# Altium PCB MCU_Control_Board.PcbDoc (part 1 of 2)
Units mil, origin at the board's own origin, x right, y up, seen from the top; angles counter-clockwise.
Board outline 5526.15 x 3406.41 mil, 2 copper layers (Top Layer, Bottom Layer); 103 components, 170 nets, 494 pads, 166 vias.
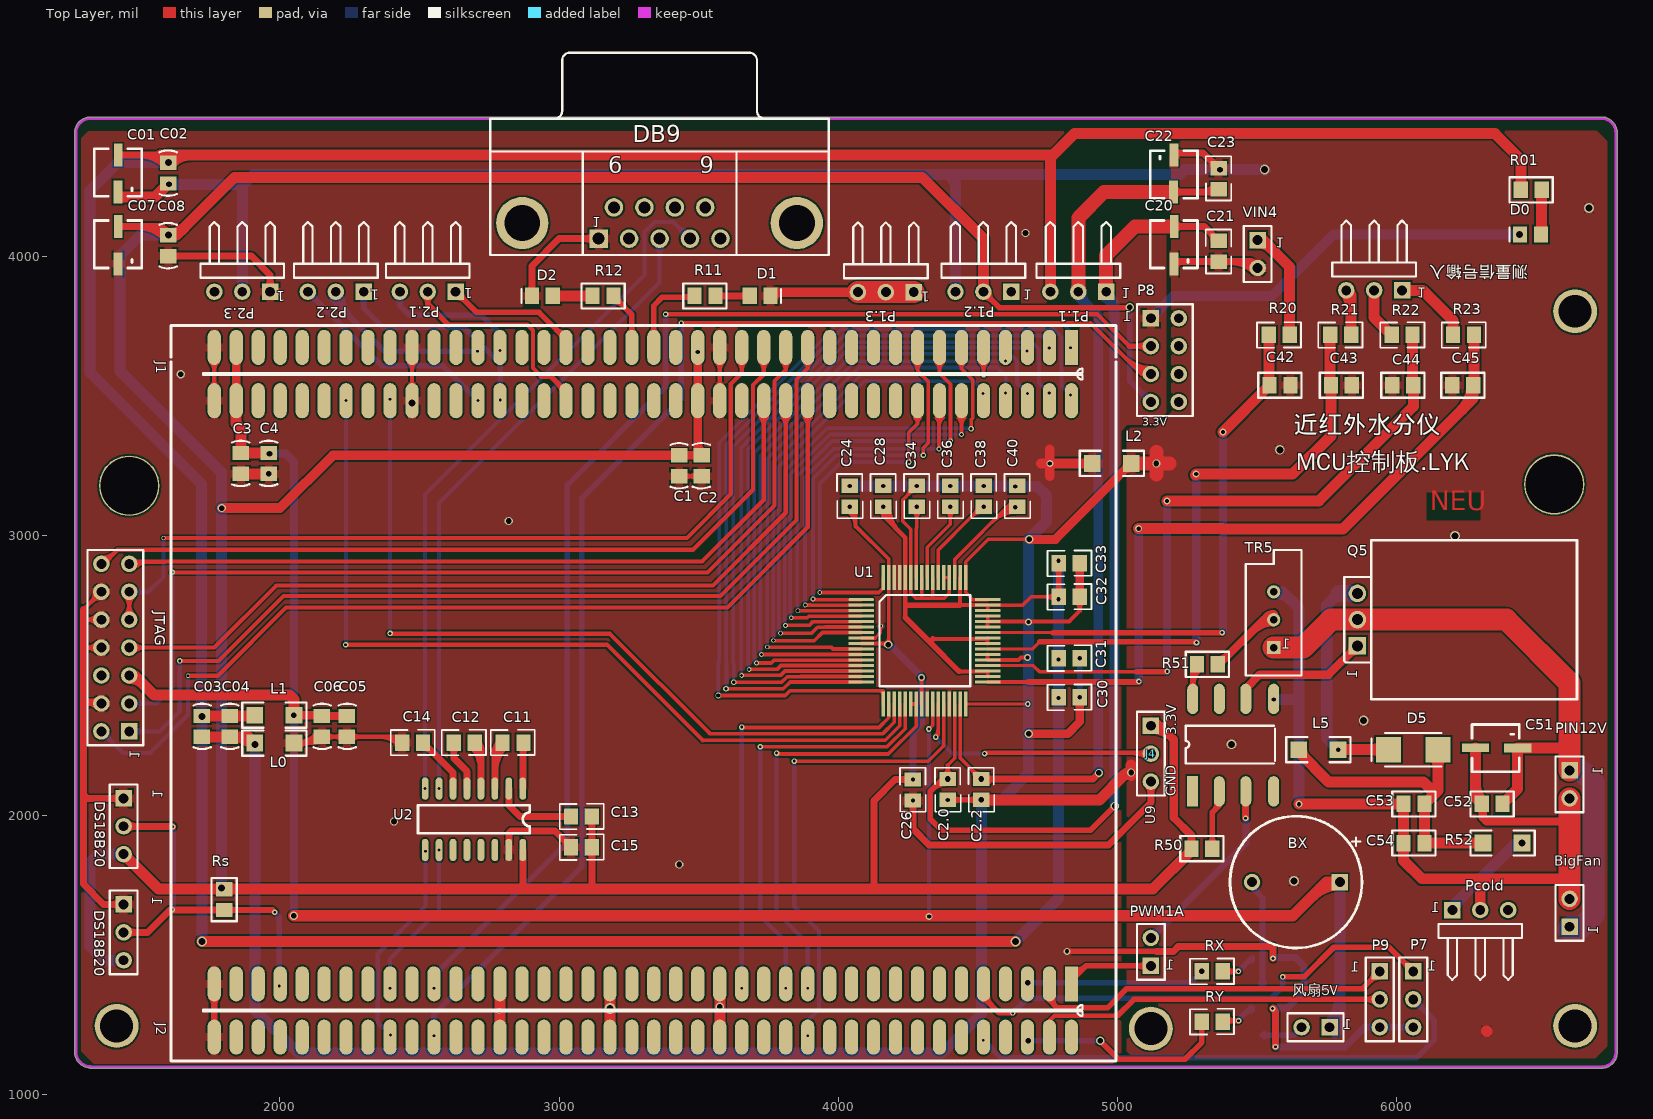
[diagram p0: Top Layer view]
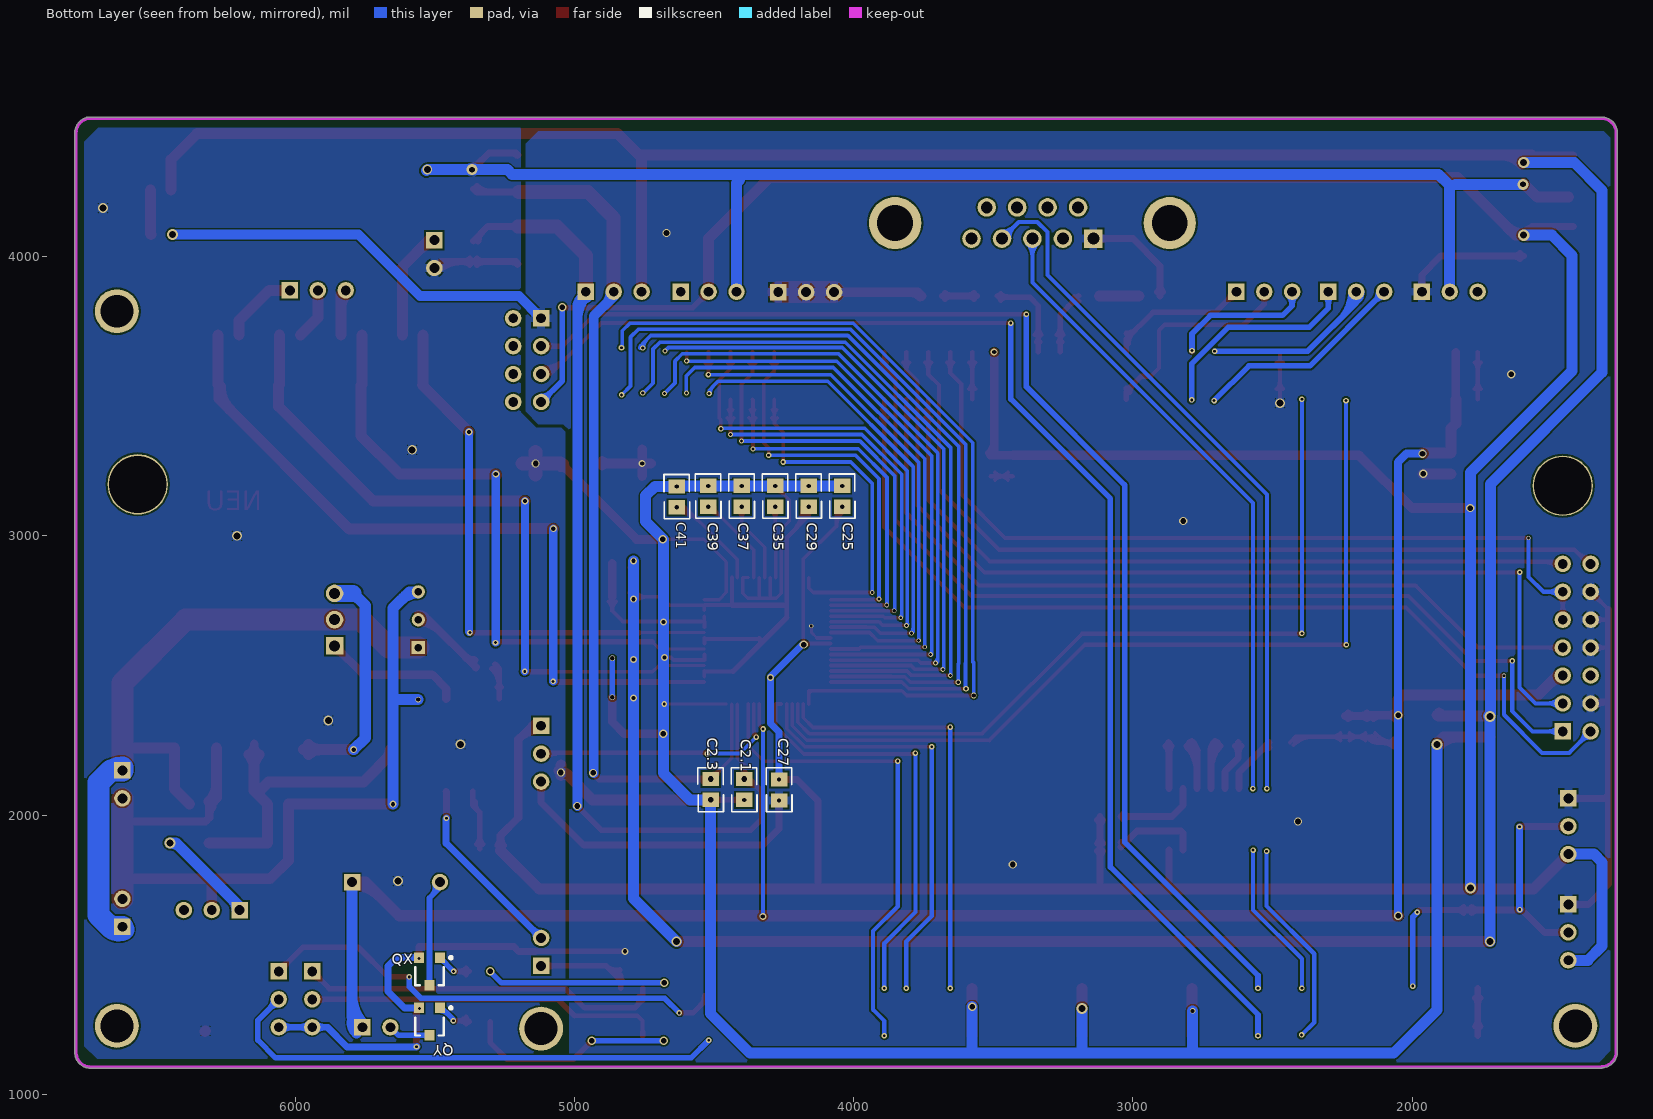
[diagram p1: Bottom Layer view, seen from below]

## Layer stack, top to bottom
Top Layer: signal copper 1.4
Dielectric: dielectric 12.6, FR-4, Dk 4.8
Bottom Layer: signal copper 1.4

## Board outline
1265.01,1144.75 cw(c1270,1145.25) 1264.98,1145.25 1264.98,4443.44 cw(c1269.75,4445) 1264.74,4445 cw(c1320,4445) 1314.5,4499.99 cw(c1315,4495) 1315,4500.02 6733.44,4500.02 cw(c6735,4495.25) 6735,4500.26 cw(c6735,4445) 6740.24,4500.02 6746.71,4500.02 cw(c6746.71,4495) 6750.75,4497.97 cw(c6735,4445) 6789.63,4453.32 cw(c6785.88,4450) 6790.89,4450 6790.27,1148.97 cw(c6785.25,1148.87) 6790.27,1148.87 cw(c6735,1148.87) 6740.55,1093.89 cw(c6735,1148.87) 6740.5,1093.88 6740.55,1093.89 cw(c6740,1098.87) 6740,1093.86 1320,1093.86 cw(c1320,1098.87) 1316.72,1095.08 cw(c1320,1150.25)

## Design rules (kind name [scope] priority, off if disabled: settings)
Clearance Clearance_1 [InNamedPolygon('Top Layer-A')] p1: gap=10
Clearance [All] p2: gap=6
HoleSize [All] p1: absolutevalues=TRUE maxlimit=200 minlimit=1 maxpercent=80.000 minpercent=20.000
HoleToHoleClearance [All] p1: gap=8 allowstackedmicrovias=TRUE
MinimumSolderMaskSliver [All] p1: minsoldermaskwidth=8
PolygonConnect [All] p1: connectstyle=Relief reliefconductorwidth=30 reliefentries=4 polygonreliefangle="90 Angle"
RoutingVias [All] p1: holewidth=20 width=20 viastyle="Through Hole" minholewidth=8 minwidth=15 maxholewidth=88 maxwidth=100
SilkToSilkClearance [All] p1: silktosilkclearance=8
SilkscreenOverComponentPads [All] p1: minsilkscreentomaskgap=8
SolderMaskExpansion [All] p1: expansion=4
TestPointUsage [All] p1: valid=0 allowmultiple=FALSE
Testpoint [All] p1: side=3 testpointundercomponent=TRUE minsize=40 maxsize=100 preferedsize=60 minholesize=0 maxholesize=40 preferedholesize=32 testpointgrid=1 style=297 order=0123456789
Width [All] p1: maxlimit=100 minlimit=8 preferedwidth=10
19 further rules are at their usual default settings.

## Components (designator, comment, footprint, x,y, rotation, side; value= is the part's Value field where it differs from the comment)
BigFan "Fan" HDR1X2 6620,1600 r90 top
BX "BELL" Beep 5640,1760 r180 top
C1 "Cap" CC0805 3430.5,3251.5 r90 top
C01 "Cap" "4*4.5 贴片电解电容"#1 1420,4357 r0 top
C2 "Cap" CC0805 3510.5,3251.5 r90 top
C02 "Cap" CC0805 1600,4300 r90 top
C2.0 "Cap" 0805-2 4392.5,2092 r90 top
C2.1 "Cap" 0805-2 4392.5,2092 r90 bottom
C2.2 "Cap" 0805-2 4512.5,2092 r90 top
C2.3 "Cap" 0805-2 4512.5,2092 r90 bottom
C3 "Cap" CC0805 1860,3260 r90 top
C03 "Cap" CC0805 1720,2318 r270 top
C4 "Cap" CC0805 1960,3260 r90 top
C04 "Cap Pol1" cc0805 1820,2318 r270 top
C05 "Cap Pol1" cc0805 2240,2318 r270 top
C06 "Cap" cc0805 2150,2318 r270 top
C07 "Cap" "4*4.5 贴片电解电容"#1 1420,4100 r0 top
C08 "Cap" CC0805 1600,4040 r90 top
C11 "0.1uf" 0805-2 2835,2260 r0 top
C12 "0.1uf" 0805-2 2660,2260 r0 top
C13 "0.1uf" 0805-2 3080,1995 r180 top
C14 "0.1uf" 0805-2 2475,2260 r180 top
C15 "0.1uf" 0805-2 3080,1885 r180 top
C20 "Cap" "4*4.5 贴片电解电容"#1 5202.5,4100 r0 top
C21 "Cap" 0805-2 5362.5,4020 r90 top
C22 "Cap" "4*4.5 贴片电解电容"#1 5202.5,4240 r180 top
C23 "Cap" 0805-2 5362.5,4280 r270 top
C24 "Cap" 0805-2 4041.5,3142 r270 top
C25 "Cap" 0805-2 4041.5,3142 r270 bottom
C26 "Cap" 0805-2 4267.5,2090 r270 top
C27 "Cap" 0805-2 4267.5,2090 r270 bottom
C28 "Cap" 0805-2 4161.5,3142 r270 top
C29 "Cap" 0805-2 4161.5,3142 r270 bottom
C30 "Cap" 0805-2 4827.5,2422 r180 top
C31 "Cap" 0805-2 4827.5,2562 r180 top
C32 "Cap" 0805-2 4827.5,2782 r180 top
C33 "Cap" 0805-2 4827.5,2902 r180 top
C34 "Cap" 0805-2 4281.5,3142 r270 top
C35 "Cap" 0805-2 4281.5,3142 r270 bottom
C36 "Cap" 0805-2 4401.5,3142 r270 top
C37 "Cap" 0805-2 4401.5,3142 r270 bottom
C38 "Cap" 0805-2 4521.5,3142 r270 top
C39 "Cap" 0805-2 4521.5,3142 r270 bottom
C40 "Cap" 0805-2 4641.5,3142 r270 top
C41 "100u/25v" 0805-2 4634,3140 r270 bottom
C42 "0.1u" 0805 5620,3540 r180 top
C43 "0.1u" 0805 5840,3540 r180 top
C44 "0.1u" 0805 5985.2,3540 r0 top
C45 "0.1u" 0805 6200,3540 r0 top
C51 "22u" "4*4.5 贴片电解电容"#2 6300,2240 r90 top
C52 "0.1u" 0805 6380,2040 r180 top
C53 "0.1u" 0805 6100,2040 r180 top
C54 "10u" 0805 6100,1900 r180 top
D0 "Alarm" LED_0805 6480,4080 r180 top
D1 "Alarm" LED_0805 3720,3860 r0 top
D2 "Alarm" LED_0805 2940,3860 r180 top
D5 "IN5817" DIODE-SMA 6060,2234.5 r180 top
DB9 "DB9" DB9 3360,4495 r0 top
DS18B20 "DS18b20" HDR1X3 1440,2060 r270 top (schematic designator Ps)
DS18B20 "DS18b20备用" HDR1X3 1440,1680 r270 top (schematic designator P6)
J1 "Head_80" SOP80 3300,3580 r180 top
J2 "Head_80" SOP80 3300,1300 r180 top
J4 "Header 3H" HDR1X3 5120,2320 r270 top
JTAG "JTAG" HDR2X7 1460,2300 r90 top (schematic designator P5)
L0 "Inductor" 1206 1980,2258 r180 top
L1 "Inductor" 1206 1980,2358 r180 top
L2 "磁珠2" 1206 4980,3260 r180 top
L5 "Inductor" 1206 5720,2234.5 r180 top
P1.1 "电源输入1" HDR1X3H 4960,3875 r180 top
P1.2 "电源输入2" HDR1X3H 4620,3875 r180 top
P1.3 "电源输入3" HDR1X3H 4270.5,3873.5 r180 top
P2.1 "MCU信号输出1" HDR1X3H 2629.5,3875 r180 top
P2.2 "MCU信号输出2" HDR1X3H 2300,3875 r180 top
P2.3 "MCU信号输出3" HDR1X3H 1965,3875 r180 top
P7 "Header 3" HDR1X3 6060,1440 r270 top
P8 "Header 4X2" HDR2X4 5120,3780 r270 top
P9 "Header 3" HDR1X3 5940,1440 r270 top
Pcold "clod" HDR1X3H 6200,1660 r0 top
PIN12V "clod" HDR1X2 6620,2160 r270 top
PWM1A "PWM" HDR1X2 5120,1460 r90 top (schematic designator P4)
Q5 "IRF530-N" TIP122-带卧式散热 5860,2700 r270 top
QX "1N9013 PNP" sot-23 5520,1440 r0 bottom
QY "1N9013 PNP" sot-23 5520,1260 r0 bottom
R01 "390K" 0805 6520,4240 r180 top
R11 "330R" 0805 3560,3860 r180 top
R12 "200R" 0805 3120,3860 r0 top
R20 "Res Semi" 0805-2 5580,3720 r0 top
R21 "Res Semi" 0805-2 5800,3720 r0 top
R22 "Res Semi" 0805-2 6020,3720 r180 top
R23 "Res Semi" 0805-2 6240,3720 r180 top
R50 "Res2" 0805 5340,1880 r180 top
R51 "Res2" 0805 5360,2540 r180 top
R52 "Res2" 1206 6380,1900 r0 top
Rs "4.7K" 0805 1800,1660 r90 top
RX "3.9K" 0805-2 5340,1440 r0 top
RY "3.9K" 0805-2 5340,1260 r0 top
TR5 "RPot" VR5 5560,2700 r90 top
U1 "AD7656" AD7656 4307.5,2662 r270 top
U2 "MAX3232" MAX3232 2695,1985 r270 top
U9 "6N137" SOIC8-kuang 5460,2080 r90 top
VIN4 "4通道跳针" HDR1X2 5502.5,4060 r270 top (schematic designator J5)
测量信号输入 "检测信号输入" HDR1X3H 6020,3880 r180 top (schematic designator P10)
风扇5V "fan" HDR1X2 5760,1240 r180 top (schematic designator FY)

## Footprints (in the part's own frame and the unit in brackets; to place one, negate y for a bottom-side part, rotate by r counter-clockwise, add the part's x,y. Pads: shape width x height; smd on the part's side, far side on the other; paste and mask are expansions set on the pad)
"4*4.5 贴片电解电容"#1 [mm] "10uf-16V / 25V铝电解电容"
  rect 0.8x2.1 smd: 1(0,-3.175) 2(0.025,0.203)
  silkscreen extent -2.16,-3.56 2.16,0.76
"4*4.5 贴片电解电容"#2 [mm] "10uf-16V / 25V铝电解电容"
  rect 0.8x2.5 smd: 1(0,-3.404) 2(0.025,0.432)
  silkscreen extent -2.16,-3.56 2.16,0.76
0805 [mm]
  rect 1.3x1.5 smd: 1(0,0) 2(1.9,0)
  silkscreen extent -1.02,-1.14 2.92,1.14
0805-2 [mm] "贴片无丝印"
  rect 1.3x1.5 smd: 1(-0.95,0) 2(0.95,0)
  silkscreen extent -2.03,-1.17 1.98,1.17
1206 [mil] "贴片元件"
  rect 60x60 smd: 1(-70,0) 2(70,0)
  silkscreen extent -115,-45 115,45, body extent -75,-35 75,35, height 39
AD7656 [mm]
  oval 0.3x2.3 smd: 1(-2.796,-5.715)
  rect 0.3x2.3 smd: 2(-2.296,-5.715) 3(-1.796,-5.715) 4(-1.296,-5.715) 5(-0.796,-5.715) 6(-0.296,-5.715) 7(0.204,-5.715) 8(0.704,-5.715) 9(1.204,-5.715) 10(1.704,-5.715) 11(2.204,-5.715) 12(2.704,-5.715) 13(3.204,-5.715) 14(3.704,-5.715) 15(4.204,-5.715) 16(4.704,-5.715) 33(4.704,5.784) 34(4.204,5.784) 35(3.704,5.784) 36(3.204,5.784) 37(2.704,5.784) 38(2.204,5.784) 39(1.704,5.784) 40(1.204,5.784) 41(0.704,5.784) 42(0.204,5.784) 43(-0.296,5.784) 44(-0.796,5.784) 45(-1.296,5.784) 46(-1.796,5.784) 47(-2.296,5.784) 48(-2.796,5.784)
  rect 2.3x0.3 smd: 17(6.704,-3.715) 18(6.704,-3.215) 19(6.704,-2.715) 20(6.704,-2.215) 21(6.704,-1.715) 22(6.704,-1.215) 23(6.704,-0.715) 24(6.704,-0.215) 25(6.704,0.285) 26(6.704,0.785) 27(6.704,1.285) 28(6.704,1.785) 29(6.704,2.285) 30(6.704,2.785) 31(6.704,3.284) 32(6.704,3.784) 49(-4.796,3.785) 50(-4.796,3.284) 51(-4.796,2.785) 52(-4.796,2.285) 53(-4.796,1.785) 54(-4.796,1.285) 55(-4.796,0.785) 56(-4.796,0.285) 57(-4.796,-0.215) 58(-4.796,-0.715) 59(-4.796,-1.215) 60(-4.796,-1.715) 61(-4.796,-2.215) 62(-4.796,-2.715) 63(-4.796,-3.215) 64(-4.796,-3.715)
  silkscreen extent -3.2,-4.06 5.09,4.19
Beep [mm] "蜂鸣器"
  rect 1.5x1.5 hole 0.9: 1(-4,0)
  round 1.5 hole 0.9: 2(4,0)
  silkscreen extent -6,-6 6,6
CC0805 [mm] "贴片电容"
  rect 1.3x1.5 smd: 1(-0.95,0) 2(0.95,0)
  silkscreen extent -2.06,-0.76 2.06,0.81, body extent -1.27,-0.64 1.27,0.64, height 0.9
cc0805 [mm] "贴片电容"
  rect 1.3x1.5 smd: 1(-0.95,0) 2(0.95,0)
  silkscreen extent -2.06,-0.76 2.06,0.81, body extent -1.27,-0.64 1.27,0.64, height 0.9
DB9 [mm] "Connector; D Subminiature; 9 Position; Right Angle; Pitch 1.385 mm"
  round 1.69 hole 1.09: 1(5.54,-10.92) 2(2.77,-10.92) 3(0,-10.92) 4(-2.77,-10.92) 6(4.155,-8.08) 7(1.385,-8.08) 8(-1.385,-8.08) 9(-4.155,-8.08)
  rect 1.69x1.69 hole 1.09: 5(-5.54,-10.92)
  round 4.76 hole 3.26: 10(-12.495,-9.5) 11(12.495,-9.5)
  silkscreen extent -15.4,-12.4 15.4,6
DIODE-SMA [mm] "贴片二极管"
  rect 2.3x2.3 smd: 1(-2.25,0) 2(2.25,0)
  silkscreen extent -2.54,-1.52 3.81,1.52, body extent -2.92,-1.4 2.92,1.4, height 3
HDR1X2 [mm] "Connector; Header; 2 Position"
  rect 1.5x1.5 hole 0.9: 1(0,0)
  round 1.5 hole 0.9: 2(2.54,0)
  silkscreen extent -1.27,-1.27 3.81,1.27
HDR1X3 [mm] "Connector; Header; 3 Position"
  rect 1.5x1.5 hole 0.9: 1(0,0)
  round 1.5 hole 0.9: 2(2.54,0) 3(5.08,0)
  silkscreen extent -1.27,-1.27 6.35,1.27
HDR1X3H [mm] "Connector; Header; 3 Position; Right Angle"
  rect 1.5x1.5 hole 0.9: 1(0,0)
  round 1.5 hole 0.9: 2(2.54,0) 3(5.08,0)
  silkscreen extent -1.27,-6.35 6.35,-1.27
HDR2X4 [mm] "Connector; Header; 4x2 Position"
  rect 1.5x1.5 hole 0.9: 1(0,0)
  round 1.5 hole 0.9: 2(0,2.54) 3(2.54,0) 4(2.54,2.54) 5(5.08,0) 6(5.08,2.54) 7(7.62,0) 8(7.62,2.54)
  silkscreen extent -1.27,-1.27 8.89,3.81
HDR2X7 [mm] "Connector; Header; 7x2 Position"
  rect 1.5x1.5 hole 0.9: 1(0,0)
  round 1.5 hole 0.9: 2(0,2.54) 3(2.54,0) 4(2.54,2.54) 5(5.08,0) 6(5.08,2.54) 7(7.62,0) 8(7.62,2.54) 9(10.16,0) 10(10.16,2.54) 11(12.7,0) 12(12.7,2.54) 13(15.24,0) 14(15.24,2.54)
  silkscreen extent -1.27,-1.27 16.51,3.81
LED_0805 [mm] "贴片二极管"
  rect 1.3x1.5 smd: 1(-0.95,0) 2(0.95,0)
  silkscreen extent 1.91,-0.63 1.91,0.64
MAX3232 [mil]
  oval 80x24 smd: 1(-110,175) 2(-110,125) 3(-110,75) 4(-110,25) 5(-110,-25) 6(-110,-75) 7(-110,-125) 8(-110,-175) 9(110,-175) 10(110,-125) 11(110,-75) 12(110,-25) 13(110,25) 14(110,75) 15(110,125) 16(110,175)
  silkscreen extent -50,-200 50,200
SOIC8-kuang [mm]
  rect 2.77x1 smd: 1(0.127,4.826)
  oval 2.77x1 smd: 2(0.127,2.413) 3(0.127,0) 4(0.127,-2.54) 5(8.54,-2.54) 6(8.54,0) 7(8.54,2.413) 8(8.54,4.826)
  silkscreen extent 2.67,-2.67 6.1,5.46
SOP80 [mm]
  rect 1.2x3.2 smd: 1(-39,-2.423)
  oval 1.2x3.2 smd: 2(-39,2.423) 3(-37,-2.423) 4(-37,2.423) 5(-35,-2.423) 6(-35,2.423) 7(-33,-2.423) 8(-33,2.423) 9(-31,-2.423) 10(-31,2.423) 11(-29,-2.423) 12(-29,2.423) 13(-27,-2.423) 14(-27,2.423) 15(-25,-2.423) 16(-25,2.423) 17(-23,-2.423) 18(-23,2.423) 19(-21,-2.423) 20(-21,2.423) 21(-19,-2.423) 22(-19,2.423) 23(-17,-2.423) 24(-17,2.423) 25(-15,-2.423) 26(-15,2.423) 27(-13,-2.423) 28(-13,2.423) 29(-11,-2.423) 30(-11,2.423) 31(-9,-2.423) 32(-9,2.423) 33(-7,-2.423) 34(-7,2.423) 35(-5,-2.423) 36(-5,2.423) 37(-3,-2.423) 38(-3,2.423) 39(-1,-2.423) 40(-1,2.423) 41(1,-2.423) 42(1,2.423) 43(3,-2.423) 44(3,2.423) 45(5,-2.423) 46(5,2.423) 47(7,-2.423) 48(7,2.423) 49(9,-2.423) 50(9,2.423) 51(11,-2.423) 52(11,2.423) 53(13,-2.423) 54(13,2.423) 55(15,-2.423) 56(15,2.423) 57(17,-2.423) 58(17,2.423) 59(19,-2.423) 60(19,2.423) 61(21,-2.423) 62(21,2.423) 63(23,-2.423) 64(23,2.423) 65(25,-2.423) 66(25,2.423) 67(27,-2.423) 68(27,2.423) 69(29,-2.423) 70(29,2.423) 71(31,-2.423) 72(31,2.423) 73(33,-2.423) 74(33,2.423) 75(35,-2.423) 76(35,2.423) 77(37,-2.423) 78(37,2.423) 79(39,-2.423) 80(39,2.423)
  silkscreen extent -40,-0.5 40,0.5
sot-23 [mm] "SOT-23; 3 Leads; Body 3.0 x 2.6 mm, inc. leads (LxW max)"
  rect 0.9x0.95 smd: 1(-0.95,-1.25) 2(0.95,-1.25) 3(0,1.25)
  silkscreen extent -2.07,-1.37 1.3,1.25
TIP122-带卧式散热 [mm]
  rect 1.6x1.6 hole 1: 1(2.385,0)
  round 1.6 hole 1: 2(0,0) 3(-2.39,0)
  silkscreen extent -7.24,-1.19 7.24,19.99
VR5 [mm] "Potentiometer; 3 Leads"
  rect 1.2x1.2 hole 0.7: 1(-2.54,0)
  round 1.2 hole 0.7: 2(0,0) 3(2.54,0)
  silkscreen extent -5.08,-2.54 6.35,2.54

## Part data
BigFan Pcold PIN12V PWM1A VIN4: library part "Header 2", "Header, 2-Pin"
BX: "Bell"
C1 C01 C2 C02 C2.0 C2.1 C2.2 C2.3 C3 C03 C4 C06 C07 C08 C20 C21 C22 C23 C24 C25 C26 C27 C28 C29 C30 C31 C32 C33 C34 C35 C36 C37 C38 C39 C40: "Capacitor"
C04 C05: "Polarized Capacitor (Radial)"
C11 C12 C13: library part Pro1AD.tmp_0.01uf_15
C14 C15: library part CAP, "Capacitor"
C41 C42 C43 C44 C45: library part Cap, "Capacitor"
C51 C52 C53 C54: library part Cap
D0 D1 D2: library part LED0, "Typical INFRARED GaAs LED"
D5: library part "Diode BAS21", "Silicon Switching Diode for High-Speed, High-Voltage Switching"
DS18B20 P1.1 P1.2 P1.3 P2.1 P2.2 P2.3 测量信号输入: library part "Header 3H", "Header, 3-Pin, Right Angle"
DS18B20 P8: library part "Header 3", "Header, 3-Pin"
J4: "Header, 3-Pin, Right Angle"
JTAG: library part head7*2
L2: library part Inductor, "Inductor"
P7 P9: "Header, 3-Pin"
Q5: library part MOSFET-N, "N-Channel MOSFET"
QX QY: library part 2N3904, "NPN General Purpose Amplifier"
R01 R11 R12 Rs RX RY: library part RES2
R20 R21 R22 R23: "Semiconductor Resistor"
R50 R51 R52: "Resistor"
TR5: "Potentiometer"
风扇5V: library part BELL, "Bell"

## Free pads (board coordinates)
  round 157.48 hole 118.11: 0(1415,1245) 2(5120,1235) 2(6640,1245) 2(6640,3805)
  round 216.54 hole 204.72: 4(1460,3180) 5(6565,3185)

## Via types
v1: diameter 20, hole 10, Top Layer to Bottom Layer, 45 vias
v2: diameter 25, hole 15, Top Layer to Bottom Layer, 30 vias
v3: diameter 30, hole 20, Top Layer to Bottom Layer, 26 vias
v4: diameter 19, hole 11, Top Layer to Bottom Layer, 13 vias
v5: diameter 35, hole 25, Top Layer to Bottom Layer, 10 vias
v6: diameter 17, hole 11, Top Layer to Bottom Layer, 9 vias
v7: diameter 40, hole 25, Top Layer to Bottom Layer, 8 vias
v8: diameter 20, hole 10.13, Top Layer to Bottom Layer, 7 vias
v9: diameter 20, hole 15, Top Layer to Bottom Layer, 5 vias
v10: diameter 15, hole 10, Top Layer to Bottom Layer, 4 vias
v11: diameter 25, hole 15.13, Top Layer to Bottom Layer, 2 vias
v12: diameter 20, hole 12, Top Layer to Bottom Layer, 2 vias
v13: diameter 39.37, hole 20.13, Top Layer to Bottom Layer, 2 vias
v14: diameter 15, hole 11, Top Layer to Bottom Layer, 1 vias
v15: diameter 17, hole 10, Top Layer to Bottom Layer, 1 vias
v16: diameter 17, hole 9, Top Layer to Bottom Layer, 1 vias

## Nets (pads, with @x,y where several pads share a name; then routed paths per layer and width w, separated by ;. In a path a pad name is that pad's centre, name@x,y a point inside that pad or via, vN(x,y) a via of type N, cw(c..) or ccw(c..) an arc to the next point about the centre after c; other vN are vias at no path point)
AD/RD: J1.68 U1.20 | length 3104.3
  Top Layer w13: 3513.5,2268.5 4168.5,2268.5 4220.28,2320.28 U1.20@4220.28,2398.07
  Top Layer w15: v1(2235,2610.5) 3171.5,2610.5 3513.5,2268.5
  Bottom Layer w13: v1(2235,2610.5) v1@2236.5,2609
  Bottom Layer w15: v1@2236.5,2609 v1(2236.5,3485)
ADBUSY: J2.31 U1.18 | length 1547.4
  Top Layer w13: v1@3654.33,2314 4146.01,2314 4180.91,2348.9 U1.18@4180.91,2398.07 ; v1@3656.81,2317.64 ccw(c3665.6,2326.44) 3665.6,2314 cw(c3665.6,2326.44) v1@3656.81,2317.64
  Bottom Layer w15: v1@3653,2316.5 v1(3654.33,2315.17) v1(3654.33,1379.37)
ADCINA0: J2.35
ADCINA1: J2.36
ADCINA2: J2.37
ADCINA3: J2.38
ADCINA4: J2.39
ADCINA5: J2.40
ADCINA6: J2.41
ADCINA7: J2.42
ADCINB0: J2.45
ADCINB1: J2.46
ADCINB2: J2.47
ADCINB3: J2.48
ADCINB4: J2.49
ADCINB5: J2.50
ADCINB6: J2.51
ADCINB7: J2.52
ADCS: J1.64 U1.19 | length 2880.2
  Top Layer w13: v1@2393,2649.5 v1@2394.49,2649.5 ; 3540,2292 4160,2292 4200.59,2332.59 U1.19@4200.59,2398.07
  Top Layer w15: v1(2394.49,2650.99) 2393,2649.5 3182.5,2649.5 3540,2292
  Bottom Layer w15: v1(2394.49,2650.99) v1(2394.49,3489.63)
ADREFIN: C40.2 C41.2 U1.51 | length 1119.9
  Top Layer w13: U1.51@4417.13,2850.82 4417.13,2915.63 4517.65,3016.15 ; 4517.31,3016.5 4518,3016.5 4606.1,3104.6 ; C40.2@4641.5,3104.6 4606.1,3104.6 ; 4606.1,3104.6 cw(c4606.1,3088.22) 4620.63,3095.78 ccw(c4606.1,3088.22) 4606.1,3104.6 ; 4606.1,3104.6 ccw(c4606.1,3120.98) 4620.63,3113.41 cw(c4606.1,3120.98) 4606.1,3104.6 ; 4551.26,3049.76 cw(c4637.56,2963.46) 4637.56,3085.51 ccw(c4637.56,2963.46) 4551.26,3049.76 ; 4573.45,3071.95 cw(c4637.56,3007.84) 4637.56,3098.51 ccw(c4637.56,3007.84) 4573.45,3071.95 ; 4590.37,3088.87 cw(c4608.42,3070.82) 4625.09,3090.14 ccw(c4608.42,3070.82) 4590.37,3088.87 ; 4595.64,3094.14 cw(c4637.56,3052.23) 4637.56,3111.51 ccw(c4637.56,3052.23) 4595.64,3094.14 ; 4600.26,3098.76 cw(c4617.58,3081.44) 4633.58,3099.99 ccw(c4617.58,3081.44) 4600.26,3098.76 ; 4610.16,3108.66 cw(c4626.75,3092.06) 4642.08,3109.83 ccw(c4626.75,3092.06) 4610.16,3108.66 ; C40.2@4614.69,3104.6 cw(c4614.69,3083.28) 4629.76,3098.36 ccw(c4614.69,3083.28) C40.2@4614.69,3104.6
  other v2: 4634,3102.6
ADRST: J2.26 U1.28 | length 1746.4
  Top Layer w13: v1@3842.5,2193 4322,2193 4377.76,2248.76 U1.28@4377.76,2398.07
  Bottom Layer w15: v1@3842.5,2195 v1(3842.5,2193.5) 3842.5,1673 3931,1584.5 3931,1303 3890.55,1262.55 v1(3890.55,1209.63)
AGND: C01.1 C2.0.1 C02.1 C2.1.1 C2.2.1 C2.3.1 C03.2 C04.2 C20.1 C21.1 C22.1 C23.1 C24.1 C25.1 C28.1 C29.1 C30.1 C31.1 C32.1 C33.1 C34.1 C35.1 C36.1 C37.1 C38.1 C39.1 C40.1 C41.1 C42.1 C43.1 C44.1 C45.1 J2.33 J2.34 J2.43 J2.44 J2.53 J2.54 L0.2 L2.1 P1.2.3 P2.3.2 U1.32 U1.37 U1.38 U1.43 U1.44 U1.45 U1.48 U1.49 U1.52 U1.53 U1.55 U1.57 U1.59 VIN4.2 | length 18832.4
  Top Layer w10: U1.32@4456.5,2398.07 v1(4678.93,2398.07) v1@4679.5,2397.5 ; 4666.86,2398.07 cw(c4666.86,2386) 4675.4,2394.53 ccw(c4666.86,2386) 4666.86,2398.07 ; 4666.86,2398.07 ccw(c4666.86,2410.14) 4675.4,2401.6 cw(c4666.86,2410.14) 4666.86,2398.07
  Top Layer w11.06: U1.53@4377.76,2850.82 U1.52@4397.44,2850.82
  Top Layer w12: v2(4281.5,3179.4) 4231.5,3129.4 4231.5,3052 4259.65,3023.85 U1.59@4259.65,2850.82 4259.65,2794.85 4278,2776.5 4293,2776.5 ; U1.57@4299.02,2850.82 4299.02,2782.52 4293,2776.5 ; U1.55@4338.39,2850.82 4338.39,2784.39 4330.5,2776.5 ; U1.52@4397.44,2850.82 4398,2850.26 4398,2795 4379.5,2776.5 4330.5,2776.5 ; U1.48@4535.24,2772.08 4482.42,2772.08 4456.5,2798 U1.49@4456.5,2850.82 4456.5,2907 4537.5,2988 v3(4684.5,2988) ; C34.1@4270.4,3168.31 cw(c4281.5,3157.21) 4281.5,3172.9 ccw(c4281.5,3157.21) C34.1@4270.4,3168.31 ; C34.1@4270.4,3168.31 ccw(c4259.31,3179.4) 4275,3179.4 cw(c4259.31,3179.4) C34.1@4270.4,3168.31 ; 4293,2776.5 4330.5,2776.5 ; 4662.77,2988 cw(c4662.77,2966.27) 4678.14,2981.64 ccw(c4662.77,2966.27) 4662.77,2988 ; 4662.77,2988 ccw(c4662.77,3009.73) 4678.14,2994.36 cw(c4662.77,3009.73) 4662.77,2988 ; 4241.34,3139.24 ccw(c4201.17,3179.4) 4257.97,3179.4 cw(c4201.17,3179.4) 4241.34,3139.24 ; 4250.84,3148.74 cw(c4277.56,3122.02) 4277.56,3159.81 ccw(c4277.56,3122.02) 4250.84,3148.74
  Top Layer w13: U1.44@4535.24,2693.34 U1.45@4535.24,2713.03
  Top Layer w15: U1.38@4535.24,2575.23 U1.37@4535.24,2555.55 4645.55,2555.55 4655,2565 v2(4678.5,2565) ; U1.43@4535.24,2673.66 U1.44@4535.24,2693.34 4827.34,2693.34 4864.9,2730.9 C32.1@4864.9,2782 ; 4864.9,2734.39 cw(c4908.58,2734.39) 4877.69,2765.27 ccw(c4908.58,2734.39) 4864.9,2734.39 ; 4864.9,2734.39 ccw(c4821.23,2734.39) 4852.11,2765.27 cw(c4821.23,2734.39) 4864.9,2734.39 ; 4664.98,2693.34 cw(c4664.98,2674.98) 4677.96,2687.96 ccw(c4664.98,2674.98) 4664.98,2693.34 ; v2@4685.04,2687.96 cw(c4698.02,2674.98) 4698.02,2693.34 ccw(c4698.02,2674.98) v2@4685.04,2687.96
  Top Layer w20: v2(4392.5,2054.6) v3(4512.5,2054.6) ; 4434.08,2054.6 cw(c4434.08,2092.24) 4407.46,2065.62 ccw(c4434.08,2092.24) 4434.08,2054.6 ; 4434.08,2054.6 ccw(c4434.08,2016.96) 4407.46,2043.57 cw(c4434.08,2016.96) 4434.08,2054.6 ; 4470.92,2054.6 cw(c4470.92,2016.96) 4497.54,2043.57 ccw(c4470.92,2016.96) 4470.92,2054.6 ; 4470.92,2054.6 ccw(c4470.92,2092.24) 4497.54,2065.62 cw(c4470.92,2092.24) 4470.92,2054.6
  Top Layer w25: C20.1@5202.5,3975 5210.1,3982.6 C21.1@5362.5,3982.6 5479.9,3982.6 VIN4.2@5502.5,3960 ; C22.1@5202.5,4365 5209.9,4372.4 5307.5,4372.4 C23.1@5362.5,4317.4 ; 5326.96,3982.6 cw(c5326.96,3951) 5349.31,3973.34 ccw(c5326.96,3951) 5326.96,3982.6 ; 5326.96,3982.6 ccw(c5326.96,4014.2) 5349.31,3991.85 cw(c5326.96,4014.2) 5326.96,3982.6 ; 5398.04,3982.6 cw(c5398.04,4014.2) 5375.69,3991.85 ccw(c5398.04,4014.2) 5398.04,3982.6 ; 5398.04,3982.6 ccw(c5398.04,3951) 5375.69,3973.34 cw(c5398.04,3951) 5398.04,3982.6 ; C20.1@5204.8,3972.7 cw(c5228.69,3948.81) 5228.69,3982.6 ccw(c5228.69,3948.81) C20.1@5204.8,3972.7 ; C22.1@5204.8,4362.7 cw(c5228.21,4339.29) 5228.21,4372.4 ccw(c5228.21,4339.29) C22.1@5204.8,4362.7 ; 5333.43,4346.47 cw(c5304.36,4317.4) 5345.47,4317.4 ccw(c5304.36,4317.4) 5333.43,4346.47 ; 5406.83,3982.6 cw(c5406.83,3864.33) 5490.46,3947.96 ccw(c5406.83,3864.33) 5406.83,3982.6 ; 5467.19,3982.6 cw(c5467.19,3924.69) 5508.14,3965.64 ccw(c5467.19,3924.69) 5467.19,3982.6
  Top Layer w30: v3(4682.5,2291.5) 4822.5,2291.5 4864.9,2333.9 v9(4864.9,2422) ; C32.1@4864.9,2782 C33.1@4864.9,2902
  Top Layer w32: v3(4684.5,2988) 4778,2988 L2.1@5050,3260 ; L2.1@5036,3260 cw(c5002.2,3260) 5026.1,3236.1 cw(c5050,3212.2) L2.1@5050,3246
  Top Layer w39.37: 1440,4215 1552.4,4215 C02.1@1600,4262.6 v13(1602.6,4260) ; C03.2@1720,2280.6 C04.2@1820,2280.6 1887.4,2280.6 L0.2@1910,2258 ; J2.54@2788.19,1209.63 J2.53@2788.19,1379.37 ; J2.44@3181.89,1209.63 v7(3181.89,1307) J2.43@3181.89,1379.37 ; J2.34@3575.59,1209.63 v3(3575.59,1313.5) J2.33@3575.59,1379.37 ; C23.1@5362.5,4317.4 v13(5367.5,4312.4) ; C04.2@1830.54,2280.6 cw(c1830.54,2178.54) 1902.71,2250.71 ccw(c1830.54,2178.54) C04.2@1830.54,2280.6 ; C04.2@1841.9,2280.6 cw(c1841.9,2183.9) 1910.28,2252.28 ccw(c1841.9,2183.9) C04.2@1841.9,2280.6
  Top Layer w40: v3(4512.5,2054.6) 4935.6,2054.6 5022.5,2141.5 ; v3@5049,2142.9 v3(5049,2152.5) ; 5049,2178.81 v3(5049,2152.5) ; v3@5055.79,2159.29 v3(5049,2152.5) ; 6322,1227 6324.5,1224.5 ; v3(5049,2152.5) ccw(c5049,2115.08) 5022.54,2141.54 cw(c5049,2115.08) v3(5049,2152.5)
  Top Layer w50: L2.1@5050,3260 5139.5,3260 v3(5140,3259.5) ; 5140,3220 v3(5140,3259.5) ; 5140,3301.5 v3(5140,3259.5) ; 5187,3259.5 v3(5140,3259.5)
  Bottom Layer w15: v2(4678.5,2565) v2@4681.5,2562
  Bottom Layer w20: v9(4864.9,2422) v9(4864.9,2562)
  Bottom Layer w30: v3@4681.5,2292.5 v3(4682.5,2291.5)
  Bottom Layer w39.37: v13(1602.6,4260) 1845,4260 ; P2.3.2@1865,3875 1865,4255 1905,4295 5223.5,4295 5240.9,4312.4 v13(5367.5,4312.4) v5(5527.6,4312.4) v5@5531.5,4308.5 ; v7(1910.5,2252.5) 1910.5,1302.5 2066,1147 2786,1147 ; v9(2786,1298.5) 2786,1147 ; v7(3181.89,1307) 3181.89,1147.39 3181.5,1147 ; v3(3575.59,1313.5) 3575.59,1148.41 3577,1147 ; v2(4041.5,3179.4) v2(4161.5,3179.4) v2(4281.5,3179.4) v2(4401.5,3179.4) v2(4521.5,3179.4) C41.1@4632,3179.4 ; 4410,4275 4420,4265 P1.2.3@4420,3875 ; v2(4634,3177.4) 4712.6,3177.4 4745.5,3144.5 4745.5,3052 v3@4683,2989.5 ; v2@4681.5,2562 4681.5,2292.5 4681.5,2150 4586.1,2054.6 v3(4512.5,2054.6) 4512.5,1288.5 4371,1147 3577,1147 ; v2@4681.5,2565 v2(4681.5,2691.5) v3@4681.5,2988 ; 2786,1147 3181.5,1147 ; 3181.5,1147 3577,1147
  other v5: 5632.5,1763.5 5409,2253.5 5882.5,2338.5 6209.5,3000.5 5582,3308.5 6689.5,4174.5
AV+12: C2.0.2 C2.1.2 C20.2 C21.2 P1.1.1 U1.30 | length 4408.5
  Top Layer w12: 4417.13,2203.63 U1.30@4417.13,2398.07
  Top Layer w13: 4392.5,2179 4417.13,2203.63
  Top Layer w15: C2.0.2@4387.2,2134.7 ccw(c4374.39,2147.51) 4392.5,2147.51 ccw(c4410.61,2147.51) C2.0.2@4397.8,2134.7 ; v3(4392.5,2129.4) 4392.5,2179 ; 4392.5,2173.08 cw(c4348.83,2173.08) 4379.71,2142.19 ccw(c4348.83,2173.08) 4392.5,2173.08 ; 4392.5,2173.08 ccw(c4436.17,2173.08) 4405.29,2142.19 cw(c4436.17,2173.08) 4392.5,2173.08
  Top Layer w20: 4353.07,2108.07 cw(c4392.5,2068.64) C2.0.2@4392.5,2124.4 ; v3(4392.5,2129.4) 4374.4,2129.4 4329.5,2084.5 4329.5,1986 4369,1946.5 4904.5,1946.5 v3(4990.5,2032.5) ; 4337.77,2092.77 cw(c4388.56,2041.98) 4388.56,2113.81 ccw(c4388.56,2041.98) 4337.77,2092.77
  Top Layer w25: C20.2@5203.5,4108 5311.9,4108 C21.2@5362.5,4057.4 ; 5333.43,4086.47 cw(c5304.36,4057.4) 5345.47,4057.4 ccw(c5304.36,4057.4) 5333.43,4086.47
  Top Layer w50: P1.1.1@4960,3875 4960,4005 5063,4108 C20.2@5203.5,4108
  Bottom Layer w35.37: P1.1.1@4960,3860 4990,3830 v3@4990,2032.5 ; P1.1.1@4951.63,3866.63 cw(c4858.98,3773.98) 4990,3773.98 ccw(c4858.98,3773.98) P1.1.1@4951.63,3866.63 ; P1.1.1@4957.03,3863.54 cw(c4945.97,3820.92) 4990,3820.92 ccw(c4945.97,3820.92) P1.1.1@4957.03,3863.54 ; P1.1.1@4971.63,3872.79 ccw(c5010.41,3865.41) 4982.5,3837.5 cw(c5010.41,3865.41) P1.1.1@4971.63,3872.79
  Bottom Layer w50: P1.1.1@4960,3860 P1.1.1@4960,3875
AV-12: C2.2.2 C2.3.2 C22.2 C23.2 P1.1.2 U1.31 | length 3854
  Top Layer w13: U1.31@4437.13,2397.75 4437.13,2204.78 v3(4512.5,2129.4) ; C2.2.2@4504,2129.4 ccw(c4483.48,2129.4) 4497.99,2143.91 ccw(c4512.5,2158.42) C2.2.2@4512.5,2137.9 ; 4473.19,2168.71 cw(c4433.88,2129.4) 4489.47,2129.4 ccw(c4433.88,2129.4) 4473.19,2168.71 ; 4482.69,2159.21 ccw(c4508.56,2185.08) 4508.56,2148.49 cw(c4508.56,2185.08) 4482.69,2159.21
  Top Layer w25: v3(4512.5,2129.4) 4515,2131.9 4526.71,2120.2 4536.05,2120.2 cw(c4536.05,2147.24) C2.2.2@4514.49,2130.91 ; v3(4934,2151) 4912.4,2129.4 4548.04,2129.4 ; C22.2@5201.5,4232 5351.9,4232 C23.2@5362.5,4242.6 ; C2.2.2@4525.69,2120.15 cw(c4548.04,2097.8) 4548.04,2129.4 ; C2.2.2@4525.69,2120.15 cw(c4548.04,2097.8) 4548.04,2129.4 ; C2.2.2@4525.69,2120.15 cw(c4548.04,2097.8) 4548.04,2129.4 ; C2.2.2@4525.69,2138.66 ccw(c4548.04,2161) 4548.04,2129.4 ; C2.2.2@4525.69,2138.66 ccw(c4548.04,2161) 4548.04,2129.4 ; C2.2.2@4525.69,2138.66 ccw(c4548.04,2161) 4548.04,2129.4 ; 5301.37,4232 ccw(c5301.37,4299.79) 5349.31,4251.85 cw(c5301.37,4299.79) 5301.37,4232
  Top Layer w50: P1.1.2@4860,3875 4860,4140 4952,4232 C22.2@5201.5,4232
  Bottom Layer w25: v3@4931.5,2148.5 v3(4934,2151)
  Bottom Layer w35.37: P1.1.2@4860,3859 4931.5,3787.5 v3@4931.5,2151 ; P1.1.2@4871.84,3875 ccw(c4939.06,3875) 4891.53,3827.47 cw(c4939.06,3875) P1.1.2@4871.84,3875
  Bottom Layer w39.37: P1.1.2@4860,3859 P1.1.2@4860,3875
AVDD3.3: P1.2.1
AVDD5.0: C01.2 C02.2 C03.1 C04.1 C28.2 C29.2 C30.2 C31.2 C32.2 C33.2 L1.2 P1.1.3 R01.2 U1.34 U1.35 U1.40 U1.41 U1.46 U1.47 U1.50 U1.60 | length 17025.8
  Top Layer w13: U1.34@4535.24,2496.49 U1.35@4535.24,2516.18 ; U1.46@4535.24,2733.5 U1.47@4535.24,2752.4 4661.4,2752.4 4691,2782 C32.2@4790.1,2782 ; 4744.01,2782 cw(c4744.01,2735.91) 4776.6,2768.5 ccw(c4744.01,2735.91) 4744.01,2782 ; 4744.01,2782 ccw(c4744.01,2828.09) 4776.6,2795.5 cw(c4744.01,2828.09) 4744.01,2782 ; 4754.49,2782 cw(c4754.49,2738.49) 4785.26,2769.26 ccw(c4754.49,2738.49) 4754.49,2782
  Top Layer w13.82: 4435.5,2752.4 4436.81,2753.71 U1.50@4436.81,2850.82
  Top Layer w15: v2(4161.5,3104.6) 4161.5,3072 ; 4239.96,2708.04 4239.96,2753 U1.60@4239.96,2850.82 4239.96,2993.54 4161.5,3072 ; 4339,2631 4531.95,2631 U1.41@4535.24,2634.29 U1.40@4535.24,2614.6 ; 4433,2515 4534.06,2515 U1.35@4535.24,2516.18 ; 4435.5,2752.4 U1.47@4535.24,2752.4 ; 4161.5,3071.76 cw(c4178.89,3071.76) 4172.3,3087.86 ccw(c4178.89,3071.76) 4161.5,3071.76 ; 4161.5,3071.77 ccw(c4134.43,3071.77) 4153.02,3091.45 cw(c4134.43,3071.77) 4161.5,3071.77 ; 4161.5,3072 cw(c4181.82,3072) 4171.07,3089.25 ccw(c4181.82,3072) 4161.5,3072 ; 4161.5,3072 ccw(c4141.18,3072) 4151.93,3089.25 cw(c4141.18,3072) 4161.5,3072 ; C28.2@4153.53,3104.65 ccw(c4212.48,3104.39) 4170.79,3062.71 cw(c4212.48,3104.39) C28.2@4153.53,3104.65 ; C28.2@4168.53,3104.58 ccw(c4263.15,3104.17) 4196.24,3037.26 cw(c4263.15,3104.17) C28.2@4168.53,3104.58 ; C28.2@4183.53,3104.52 ccw(c4313.83,3103.95) 4221.69,3011.81 cw(c4313.83,3103.95) C28.2@4183.53,3104.52
  Top Layer w20: 4239.96,2708.04 4328,2620 ; 4241.16,2752.4 4435.5,2752.4 ; 4339,2631 4328,2620 ; 4433,2515 4328,2620 ; C32.2@4790.1,2782 C33.2@4790.1,2902 ; 4790.1,2823.58 cw(c4752.46,2823.58) 4779.07,2796.96 ccw(c4752.46,2823.58) 4790.1,2823.58 ; 4790.1,2823.58 ccw(c4827.74,2823.58) 4801.12,2796.96 cw(c4827.74,2823.58) 4790.1,2823.58 ; 4790.1,2860.42 cw(c4827.74,2860.42) 4801.12,2887.04 ccw(c4827.74,2860.42) 4790.1,2860.42 ; 4790.1,2860.42 ccw(c4752.46,2860.42) 4779.07,2887.04 cw(c4752.46,2860.42) 4790.1,2860.42
  Top Layer w25: C01.2@1421,4365 1572.4,4365 ; 1497.83,4365 cw(c1497.83,4239.17) 1586.81,4328.15 ccw(c1497.83,4239.17) 1497.83,4365 ; 1558.19,4365 cw(c1558.19,4299.53) 1604.48,4345.82 ccw(c1558.19,4299.53) 1558.19,4365
  Top Layer w39.37: 1572.4,4365 4769.5,4365 ; C03.1@1720,2355.4 C04.1@1820,2355.4 1907.4,2355.4 L1.2@1910,2358 ; v5(1721,1547) v5(4635,1547) ; P1.1.3@4760,3875 4760,4355.5 4769.5,4365 ; R01.2@6445.2,4240 6445.2,4348.8 6352,4442 4846.5,4442 4769.5,4365 ; C02.2@1580.27,4361.06 cw(c1589.77,4351.56) 1589.77,4365 ccw(c1589.77,4351.56) C02.2@1580.27,4361.06 ; C02.2@1600.22,4337.18 cw(c1667.39,4270.01) 1667.39,4365 ccw(c1667.39,4270.01) C02.2@1600.22,4337.18 ; C02.2@1608.11,4333.23 cw(c1684.82,4256.52) 1684.82,4365 ccw(c1684.82,4256.52) C02.2@1608.11,4333.23 ; 1878.82,2355.4 ccw(c1878.82,2389.18) 1902.71,2365.29 cw(c1878.82,2389.18) 1878.82,2355.4
  Bottom Layer w39.37: v7(1600,4337.4) 1418.9,4337.4 1319,4237.5 1319,3586.5 1719.5,3186 1719.5,2361.9 v7@1726,2355.4 ; v5(1721,1547) v7(1721,2353) ; v5(4635,1547) 4789.5,1701.5 v2(4789.5,2911)
  other v2: 4789.5,2419.5 4789.5,2557.5 4789.5,2773.5
BELL_A: J2.5 RX.1 | length 640.1
  Bottom Layer w20: v3(4679.5,1399) 5261.6,1399 v3(5302.6,1440)
BLUD_IND_A: J1.41 R12.2 | length 427.1
  Top Layer w20: R12.2@3194.8,3860 3232.77,3822.03 3232.77,3820.23 3260.63,3792.37 J1.41@3260.63,3659.37 ; J1.41@3251,3721.37 ccw(c3227.74,3744.63) 3260.63,3744.63 ccw(c3293.52,3744.63) J1.41@3270.26,3721.37 ; J1.41@3255.17,3694.35 ccw(c3242,3707.53) 3260.63,3707.53 ccw(c3279.26,3707.53) J1.41@3266.09,3694.35 ; R12.2@3194.8,3840.47 cw(c3194.8,3793.33) 3228.14,3826.66 ccw(c3194.8,3793.33) R12.2@3194.8,3840.47 ; R12.2@3210.39,3856.06 ccw(c3238.53,3856.06) 3218.63,3836.17 cw(c3238.53,3856.06) R12.2@3210.39,3856.06
CLKOUT: J1.75
CONVSETA: J2.25 U1.22 U1.23 | length 1558.8
  Top Layer w13: v1@3779,2219 4179.5,2219 4279.33,2318.83 U1.23@4279.33,2398.07 U1.22@4259.65,2398.07 ; v1@3781.47,2224.47 ccw(c3794.69,2237.69) 3794.69,2219 cw(c3794.69,2237.69) v1@3781.47,2224.47
  Bottom Layer w15: v1(3779,2222) 3779,1652.5 3890.55,1540.95 v1(3890.55,1379.37)
CONVSETC: J2.27 U1.21 | length 1538
  Top Layer w13: v1@3720.5,2245.5 4176,2245.5 4239.96,2309.46 U1.21@4239.96,2398.07
  Bottom Layer w15: v1(3720.5,2245) 3720.5,1638.5 3811.81,1547.19 v1(3811.81,1379.37)
DATA0: J1.1 U1.17 | length 3227.9
  Top Layer w13: v9(3570,2428.5) 3810.5,2428.5 3827.5,2445.5 4150.5,2445.5 ; 4161,2445.5 4150.5,2445.5 ; U1.17@4161.22,2432.28 U1.17@4161.22,2398.07 4161.22,2434.78 4150.5,2445.5 ; 4150.5,2445.5 cw(c4150.5,2433.48) U1.17@4161.78,2437.65 ; 4150.5,2445.5 cw(c4150.5,2433.48) U1.17@4161.78,2437.65 ; 4150.5,2445.5 cw(c4150.5,2433.48) U1.17@4161.78,2437.65 ; 4150.5,2445.5 cw(c4150.5,2433.48) U1.17@4161.78,2437.65 ; 4143.2,2445.5 cw(c4143.2,2419.41) 4161.64,2437.86 ccw(c4143.2,2419.41) 4143.2,2445.5
  Bottom Layer w13: v9(3570,2428.5) v9@3573.5,2428.5 ; v9@3570.5,2428.5 3570.5,2548 ; 3573.5,2547.5 3573.5,3333.5 4002,3762 4802,3762 4829,3735 4829,3677.5 v1(4832,3674.5) ; 4829,3690.19 ccw(c4847.69,3690.19) 4834.47,3676.97 cw(c4847.69,3690.19) 4829,3690.19
DATA1: J1.2 U1.16 | length 2998.2
  Top Layer w13: v12(3598,2452.5) 3803.5,2452.5 3827.81,2476.81 U1.16@4082.48,2476.81 ; v12@3599.5,2454.5 v12@3599.5,2456.5
  Bottom Layer w13: v12(3598,2452.5) 3599.5,2452.5 3599.5,2543.5 3599,2544 3599,3328 4011,3740 4772.5,3740 4800,3712.5 4800,3537 v4(4831.5,3505.5) ; v12@3595.53,2454.97 ccw(c3585.93,2464.57) 3599.5,2464.57 cw(c3585.93,2464.57) v12@3595.53,2454.97
DATA2: J1.3 U1.15 | length 2681.6
  Top Layer w13: v12(3625.5,2476.5) 3797.5,2476.5 3817,2496 3865.5,2496 3865.99,2496.49 U1.15@4082.48,2496.49
  Bottom Layer w13: v12(3625.5,2476.5) 3625.5,2541.5 3624.5,2542.5 3624.5,3321.5 4021,3718 4727.5,3718 4756,3689.5 v4(4756,3673.5) ; 4739.56,3705.94 cw(c4707.13,3673.5) v4@4753,3673.5 ; 4761.76,3683.74 cw(c4751.51,3673.5) 4766,3673.5
DATA3: J1.4 U1.14 | length 2692.2
  Top Layer w13: v6@3654,2505 v6(3654,2500.5) 3793.5,2500.5 3809.18,2516.18 U1.14@4082.48,2516.18 ; v4(4756,3512.5) J1.4@4756.69,3511.81
  Bottom Layer w13: v6(3654,2500.5) 3652,2502.5 3652,3315.5 4031,3694.5 4694.5,3694.5 4719,3670 4719,3547.5 4754,3512.5 v4(4756,3512.5) ; 4747.46,3519.04 ccw(c4756,3527.57) v4@4756,3515.5 ; 3652,2510.16 ccw(c3663.66,2510.16) 3655.41,2501.91 cw(c3663.66,2510.16) 3652,2510.16
DATA4: J1.5 U1.13 | length 2384.2
  Top Layer w13: v6(3681,2522) 3781,2522 3794.86,2535.86 U1.13@4082.48,2535.86
  Bottom Layer w13: v6(3681,2522) 3677,2522 3677,3311 4041,3675 4663.5,3675 v4(4676,3662.5) ; 3677,2536.49 ccw(c3695.49,2536.49) 3682.41,2523.41 cw(c3695.49,2536.49) 3677,2536.49
DATA5: J1.6 U1.12 | length 2425.5
  Top Layer w13: v6(3707,2545) v6@3705.5,2545 ; v6@3707.5,2547 v6@3705.5,2545 ; U1.12@4082.03,2556 U1.12@4082.48,2555.55 4081.8,2554.86 3769.54,2554.86 3759.68,2545 v6@3705.5,2545
  Bottom Layer w13: v6(3707,2545) 3703,2545 3699,2549 3699,3297 4054.5,3652.5 4614.5,3652.5 4640.5,3626.5 4640.5,3548 v4(4678,3510.5) ; 3699,2569.14 ccw(c3731.14,2569.14) 3708.41,2546.41 cw(c3731.14,2569.14) 3699,2569.14
DATA6: J1.7 U1.11 | length 2157.5
  Top Layer w13: v6(3724.5,2575.5) 4082.22,2575.5 U1.11@4082.48,2575.23 ; v4(4598.5,3627) J1.7@4598.5,3658.66
  Bottom Layer w13: v6(3724.5,2575.5) 3721,2575.5 3721,3286.5 4060.5,3626 4597.5,3626 v4(4598.5,3627) ; 4588.84,3626 ccw(c4588.84,3636.66) v4@4596.38,3629.12 ; 3721,2588.78 ccw(c3737.78,2588.78) 3725.91,2576.91 cw(c3737.78,2588.78) 3721,2588.78
DATA7: J1.8 U1.10 | length 2077.1
  Top Layer w13: v10(3746,2602) 3974,2602 3981.08,2594.92 U1.10@4082.48,2594.92
  Bottom Layer w13: v10(3746,2602) 3746,3276.5 4073,3603.5 4570,3603.5 4599.5,3574 v4(4599.5,3512)
DATA8: J1.9 U1.7 | length 2038.3
  Top Layer w13: v14(3767.5,2625) 3914.5,2625 3943.5,2654 3992.5,2654 ; 3992.53,2653.97 U1.7@4082.48,2653.97 ; J1.9@4508.37,3620.89 cw(c4479.14,3591.66) 4520.47,3591.66 cw(c4561.81,3591.66) J1.9@4532.58,3620.89 ; J1.9@4512.54,3621.91 cw(c4493.39,3602.76) 4520.47,3602.76 cw(c4547.55,3602.76) J1.9@4528.4,3621.91 ; J1.9@4520.47,3659.37 4520.47,3578.53 v4(4521,3578)
  Bottom Layer w13: v14(3767.5,2625) 3767.5,3263.5 4082,3578 v4(4521,3578)
DATA9: J1.10 U1.6 | length 1874.3
  Top Layer w13: v6(3793.5,2651.5) 3904,2651.5 3926,2673.5 3953.5,2673.5 ; 3953.66,2673.66 U1.6@4082.48,2673.66
  Bottom Layer w13: v6@3795.5,2651 3795,2651.5 v6(3793.5,2651.5) 3787.5,2657.5 3787.5,3248.5 4093,3554 4486,3554 4518,3522 v4(4518,3510.5) ; 4504.75,3535.25 cw(c4479.99,3510.5) v4@4515,3510.5 ; 4506.45,3533.55 cw(c4483.41,3510.5) v4@4516,3510.5 ; 3787.5,2670.81 ccw(c3812.81,2670.81) 3794.91,2652.91 cw(c3812.81,2670.81) 3787.5,2670.81
DATA10: J1.11 U1.5 | length 1985.1
  Top Layer w13: v6(3811.5,2679.5) 3896,2679.5 3909.84,2693.34 U1.5@4082.48,2693.34 ; J1.11@4431.63,3619.18 cw(c4417.07,3599.27) 4441.73,3599.27 ; J1.11@4433.8,3621.91 cw(c4414.65,3602.76) 4441.73,3602.76 cw(c4468.81,3602.76) J1.11@4449.66,3621.91 ; J1.11@4441.73,3659.37 4441.73,3599.27 ; J1.11@4451.84,3619.18 ccw(c4466.4,3599.27) 4441.73,3599.27 ; v4(4476,3384) 4476,3416 4482,3422 4482,3559 4441.73,3599.27
  Bottom Layer w13: v6@3806.5,2684.5 v6@3808,2683 ; v6(3811.5,2679.5) v6@3808,2683 ; 4465.14,3385.5 cw(c4465.14,3373.14) v4@4473.88,3381.88 ; v4(4476,3384) 4474.5,3385.5 3960.5,3385.5 3808,3233 v6@3808,2683 ; 3808,2692.78 ccw(c3824.78,2692.78) 3812.91,2680.91 cw(c3824.78,2692.78) 3808,2692.78
DATA11: J1.12 U1.4 | length 1695.3
  Top Layer w13: v16(3832,2707) 3888.5,2707 3894,2712.5 ; 3898.95,2713.03 U1.4@4082.48,2713.03 ; 4429.63,3424.15 cw(c4400.96,3395.49) 4441.5,3395.49 ; J1.12@4433.8,3452.17 cw(c4415.22,3433.59) J1.12@4441.5,3433.59 ; v4(4441.5,3363.5) 4441.5,3489.4 J1.12@4441.73,3489.63 ; 4441.5,3394.36 cw(c4483.63,3394.36) 4453.84,3424.15 ; J1.12@4441.5,3432.46 cw(c4469.37,3432.46) J1.12@4449.66,3452.17
  Bottom Layer w13: v16(3832,2707) 3828.5,2710.5 3828.5,3221 3971,3363.5 v4(4441.5,3363.5) ; 3828.5,2720.28 ccw(c3845.28,2720.28) 3833.41,2708.41 cw(c3845.28,2720.28) 3828.5,2720.28
DATA12: J1.13 U1.3 | length 1780.9
  Top Layer w13: v6@3859.5,2732.5 3858,2734 3855.5,2734 3855,2733.5 v6(3855,2732) 3872.66,2732 3873.16,2731.5 3890.55,2731.5 3891.08,2732.03 3898.03,2732.03 3898.71,2732.71 U1.3@4082.48,2732.71 ; J1.13@4350.89,3620.89 cw(c4321.66,3591.66) 4362.99,3591.66 cw(c4404.33,3591.66) J1.13@4375.1,3620.89 ; J1.13@4355.06,3621.91 cw(c4335.91,3602.76) 4362.99,3602.76 cw(c4390.07,3602.76) J1.13@4370.92,3621.91 ; J1.13@4362.99,3659.37 4362.99,3583.01 4402,3544 v4(4402,3340)
  Bottom Layer w13: v6(3855,2732) 3853,2734 3853,3215 3978,3340 v4(4402,3340) ; 3853,2741.66 ccw(c3864.66,2741.66) 3856.41,2733.41 cw(c3864.66,2741.66) 3853,2741.66
DATA13: J1.14 U1.2 | length 1470.7
  Top Layer w13: v6@3880,2752.5 v6(3881.86,2752.5) v6(3881.86,2752.5) 3900,2752.5 3900.1,2752.4 U1.2@4082.48,2752.4 ; 4350.89,3424.15 cw(c4326.47,3399.74) 4361,3399.74 ; J1.14@4355.06,3452.17 cw(c4340.73,3437.83) J1.14@4361,3437.83 ; v4(4361,3311.5) 4361,3487.64 J1.14@4362.99,3489.63 ; 4361,3390.11 cw(c4409.14,3390.11) 4375.1,3424.15 ; J1.14@4361,3428.21 cw(c4394.88,3428.21) J1.14@4370.92,3452.17
  Bottom Layer w13: v6@3881.93,2750.93 3881.86,2751 v6(3881.86,2752.5) 3881,2753.36 3881,3209.5 3983.5,3312 4360.5,3312 v4(4361,3311.5)
DATA14: J1.15 U1.1 | length 1559.5
  Top Layer w13: v6(3909.5,2774) 3907.58,2772.08 U1.1@4082.48,2772.08 ; J1.15@4272.15,3620.89 cw(c4242.92,3591.66) 4284.25,3591.66 cw(c4325.59,3591.66) J1.15@4296.36,3620.89 ; J1.15@4276.32,3621.91 cw(c4257.17,3602.76) 4284.25,3602.76 cw(c4311.33,3602.76) J1.15@4292.18,3621.91 ; J1.15@4284.25,3659.37 4284.25,3591.25 4323,3552.5 4323,3333.5 4305,3315.5 v1(4305,3289.5) ; v6@3910.91,2775.41 ccw(c3918.95,2783.45) 3918.95,2772.08 cw(c3918.95,2783.45) v6@3910.91,2775.41
  Bottom Layer w13: v6@3910.5,2773 v6(3909.5,2774) 3909.5,3205.5 3993.5,3289.5 v1(4305,3289.5)
DATA15: J1.16 U1.64 | length 1337.1
  Top Layer w13: v15(3933.5,2797.5) 4145,2797.5 4161.22,2813.72 U1.64@4161.22,2850.82 ; v1(4253,3265) 4253,3371 4284.25,3402.25 ; 4274.06,3422.51 cw(c4259.05,3402.25) 4284.25,3402.25 ; J1.16@4276.32,3452.17 cw(c4257.17,3433.02) 4284.25,3433.02 cw(c4311.33,3433.02) J1.16@4292.18,3452.17 ; J1.16@4284.25,3489.63 4284.25,3402.25 ; 4294.45,3422.51 ccw(c4309.46,3402.25) 4284.25,3402.25
  Bottom Layer w13: v15(3933.5,2797.5) 3933.5,3184.5 ; 3933.5,3188 4010.5,3265 v1(4253,3265)

## Text inside footprints (layer, text, board x,y; h text height)
DB9: Top Overlay "9" at 3503.9,4299.13 h59.06; Top Overlay "6" at 3176.73,4299.13 h59.06